# EAGLE board module_generic_bottom_board (EAGLE 7.5.0)
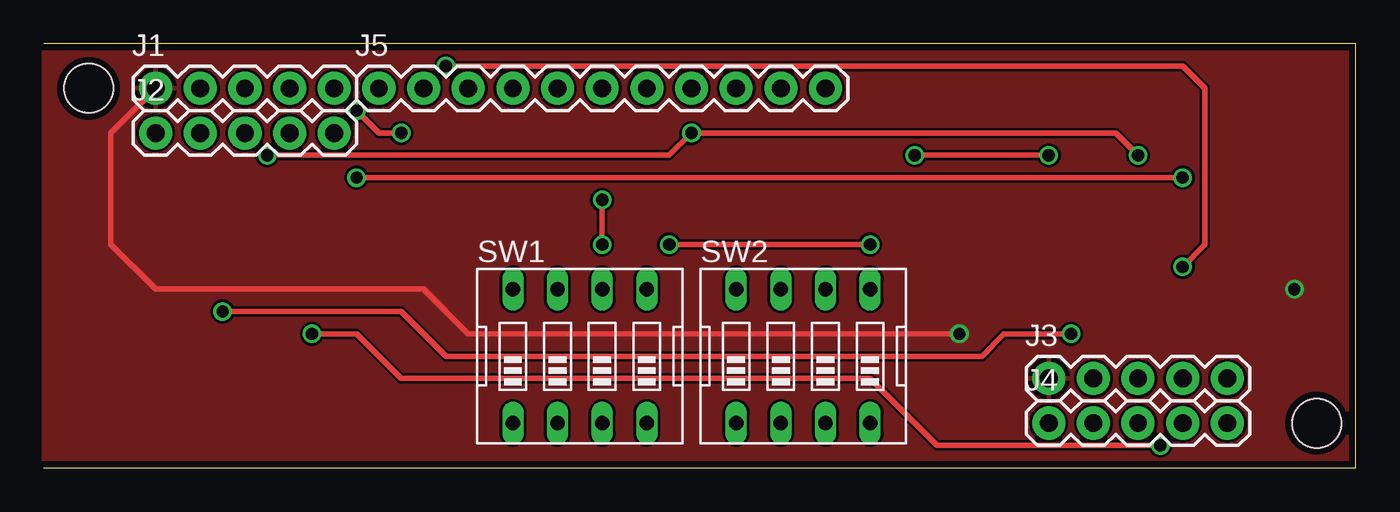
[diagram p0: board, top side]
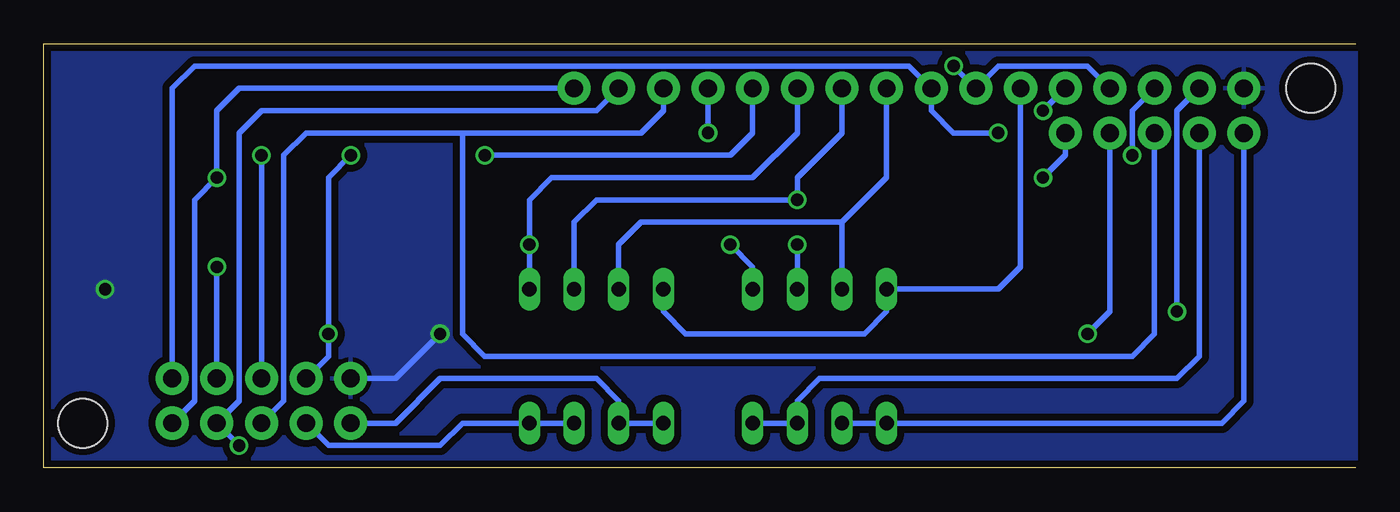
[diagram p1: board, bottom side, seen from below]

Size 74.6 x 24.12 mm. Coordinates in mm from the lower left corner, seen from the top.
Outline: 0,0 74.6,0 74.6,24.12 0,24.12
Copper layers (1*16): Top 0.0356mm / dielectric 1.5011mm / Bottom 0.0356mm
Design rules "LaenPCBOrder": minimum track width 6mil, minimum drill 13mil, track to track 6mil, track to pad 6mil, pad to pad 6mil, via to via 6mil, smd to smd 6mil, copper to edge 15mil, drill to drill 6mil, minimum pad ring 7mil, minimum via ring 7mil, stop-mask expansion 3mil, vias tented up to drill 0mil, thermal gap 10mil
Holes 2.8 mm at 72.39,2.54 2.54,21.59

## Footprints (pad centres in the part's own frame; a part is rotated, then mirrored left to right if it is on the bottom)
1X05 = drill 1.016 pad 1.88: 1 0,0; 2 2.54,0; 3 5.08,0; 4 7.62,0; 5 10.16,0
1X11 = drill 1.016 pad 1.88: 1 0,0; 2 2.54,0; 3 5.08,0; 4 7.62,0; 5 10.16,0; 6 12.7,0; 7 15.24,0; 8 17.78,0; 9 20.32,0; 10 22.86,0; 11 25.4,0
EDG-04 = drill 0.813 long: 1 -3.81,-3.81; 2 -1.27,-3.81; 3 1.27,-3.81; 4 3.81,-3.81; 5 3.81,3.81; 6 1.27,3.81; 7 -1.27,3.81; 8 -3.81,3.81

## Placement (x,y rotation side)
J1  [1X05]  6.35,21.59 0 top
J2  [1X05]  6.35,19.05 0 top
J3  [1X05]  57.15,5.08 0 top
J4  [1X05]  57.15,2.54 0 top
J5  [1X11]  19.05,21.59 0 top
SW1  [EDG-04]  30.48,6.35 0 top
SW2  [EDG-04]  43.18,6.35 0 top

## Library data of the parts
J1-J5 = SparkFun-Connectors
SW1 SW2 = special

## Nets
GND: J1.1 J3.1
N$1: J2.3 J4.3 J5.9
N$2: J2.4 J4.4 J5.10
N$3: J2.5 J4.5 J5.11
N$4: J2.1 SW1.1 SW1.2
N$5: J5.1 SW1.8 SW2.8
N$6: J5.4 SW1.7 SW2.7
N$7: J5.5 SW1.6 SW2.6
N$8: J5.6 SW1.5 SW2.5
N$10: J1.3 J3.3 J5.8
N$11: J1.2 J3.2 J5.7
N$12: J4.1 SW2.1 SW2.2
N$13: J1.4 J3.4 J5.2
N$14: J4.2 SW2.3 SW2.4
N$15: J2.2 SW1.3 SW1.4
N$17: J1.5 J3.5 J5.3

## Tracks (layer width: path | path; a pad name or v marks a point on that pad's centre or on a via)
GND  (via drill 0.7 pad 0.61)
  Top 0.305: J1.1 3.81,19.05 3.81,12.7 6.35,10.16 21.59,10.16 24.13,7.62 v52.07,7.62
  Bottom 0.305: J3.1 54.61,5.08 v52.07,7.62
  other vias: 71.12,10.16
  pour Bottom (isolate 0.406): 0,0 0,24.13 74.93,24.13 74.93,0
  pour Top: 0,0 0,24.13 74.93,24.13 74.93,0
  pour Bottom (isolate 0.406): 0,0 0,24.13 74.93,24.13 74.93,0
N$1
  Bottom 0.305: J2.3 11.43,7.62 12.7,6.35 49.53,6.35 50.8,7.62 50.8,19.05 | 50.8,19.05 59.69,19.05 60.96,17.78 60.96,3.81 J4.3 | J5.9 39.37,20.32 40.64,19.05 50.8,19.05
N$2  (via drill 0.7 pad 0.61)
  Top 0.305: v15.24,7.62 17.78,7.62 20.32,5.08 46.99,5.08 50.8,1.27 v63.5,1.27
  Bottom 0.305: J2.4 13.97,8.89 v15.24,7.62 | v63.5,1.27 J4.4 63.5,3.81 63.5,19.05 62.23,20.32 43.18,20.32 J5.10
N$3  (via drill 0.7 pad 0.61)
  Top 0.305: v17.78,16.51 v64.77,16.51
  Bottom 0.305: J2.5 16.51,17.78 v17.78,16.51 | J4.5 66.04,3.81 66.04,15.24 v64.77,16.51 64.77,20.32 63.5,21.59 J5.11
N$4
  Bottom 0.305: J2.1 6.35,3.81 7.62,2.54 SW1.1 SW1.2
N$5
  Bottom 0.305: J5.1 19.05,11.43 20.32,10.16 SW1.8 26.67,8.89 27.94,7.62 38.1,7.62 39.37,8.89 SW2.8
N$6
  Bottom 0.305: J5.4 26.67,16.51 29.21,13.97 | 29.21,13.97 40.64,13.97 41.91,12.7 SW2.7 | SW1.7 29.21,13.97
N$7  (via drill 0.7 pad 0.61)
  Top 0.305: v31.75,15.24 v31.75,12.7
  Bottom 0.305: J5.5 29.21,19.05 31.75,16.51 v31.75,15.24 43.18,15.24 44.45,13.97 SW2.6 | SW1.6 v31.75,12.7
N$8  (via drill 0.7 pad 0.61)
  Top 0.305: v35.56,12.7 v46.99,12.7
  Bottom 0.305: J5.6 31.75,19.05 34.29,16.51 45.72,16.51 46.99,15.24 v46.99,12.7 SW2.5 | SW1.5 34.29,11.43 v35.56,12.7
N$10  (via drill 0.7 pad 0.61)
  Top 0.305: v12.7,17.78 35.56,17.78 v36.83,19.05 60.96,19.05 v62.23,17.78
  Bottom 0.305: J1.3 12.7,20.32 v12.7,17.78 | J5.8 v36.83,19.05 | J3.3 v62.23,17.78
N$11  (via drill 0.7 pad 0.61)
  Top 0.305: v10.16,8.89 20.32,8.89 22.86,6.35 53.34,6.35 54.61,7.62 v58.42,7.62 | v49.53,17.78 v57.15,17.78
  Bottom 0.305: J1.2 10.16,20.32 v10.16,8.89 | J3.2 58.42,6.35 v58.42,7.62 58.42,16.51 v57.15,17.78 | J5.7 34.29,19.05 35.56,17.78 v49.53,17.78
N$12
  Bottom 0.305: J4.1 54.61,2.54 52.07,5.08 43.18,5.08 41.91,3.81 SW2.2 SW2.1
N$13  (via drill 0.7 pad 0.61)
  Top 0.305: v22.86,22.86 64.77,22.86 66.04,21.59 66.04,12.7 v64.77,11.43
  Bottom 0.305: J1.4 15.24,22.86 20.32,22.86 J5.2 v22.86,22.86 | J3.4 v64.77,11.43
N$14
  Bottom 0.305: J4.2 58.42,1.27 52.07,1.27 50.8,2.54 SW2.4 SW2.3
N$15
  Bottom 0.305: J2.2 8.89,6.35 10.16,5.08 30.48,5.08 31.75,3.81 SW1.3 SW1.4
N$17  (via drill 0.7 pad 0.61)
  Top 0.305: v17.78,20.32 19.05,19.05 v20.32,19.05
  Bottom 0.305: J1.5 v17.78,20.32 | J3.5 67.31,21.59 66.04,22.86 25.4,22.86 J5.3 24.13,20.32 22.86,19.05 v20.32,19.05